# Altium PCB MasterBoardv2.PcbDoc (part 2 of 2)
Units mil, origin at the board's own origin, x right, y up, seen from the top; angles counter-clockwise.
Board outline 13400 x 7290 mil, 2 copper layers (Top Layer, Bottom Layer); 333 components, 276 nets, 860 pads, 107 vias.
Unrouted connection lines stored in the file: 191.
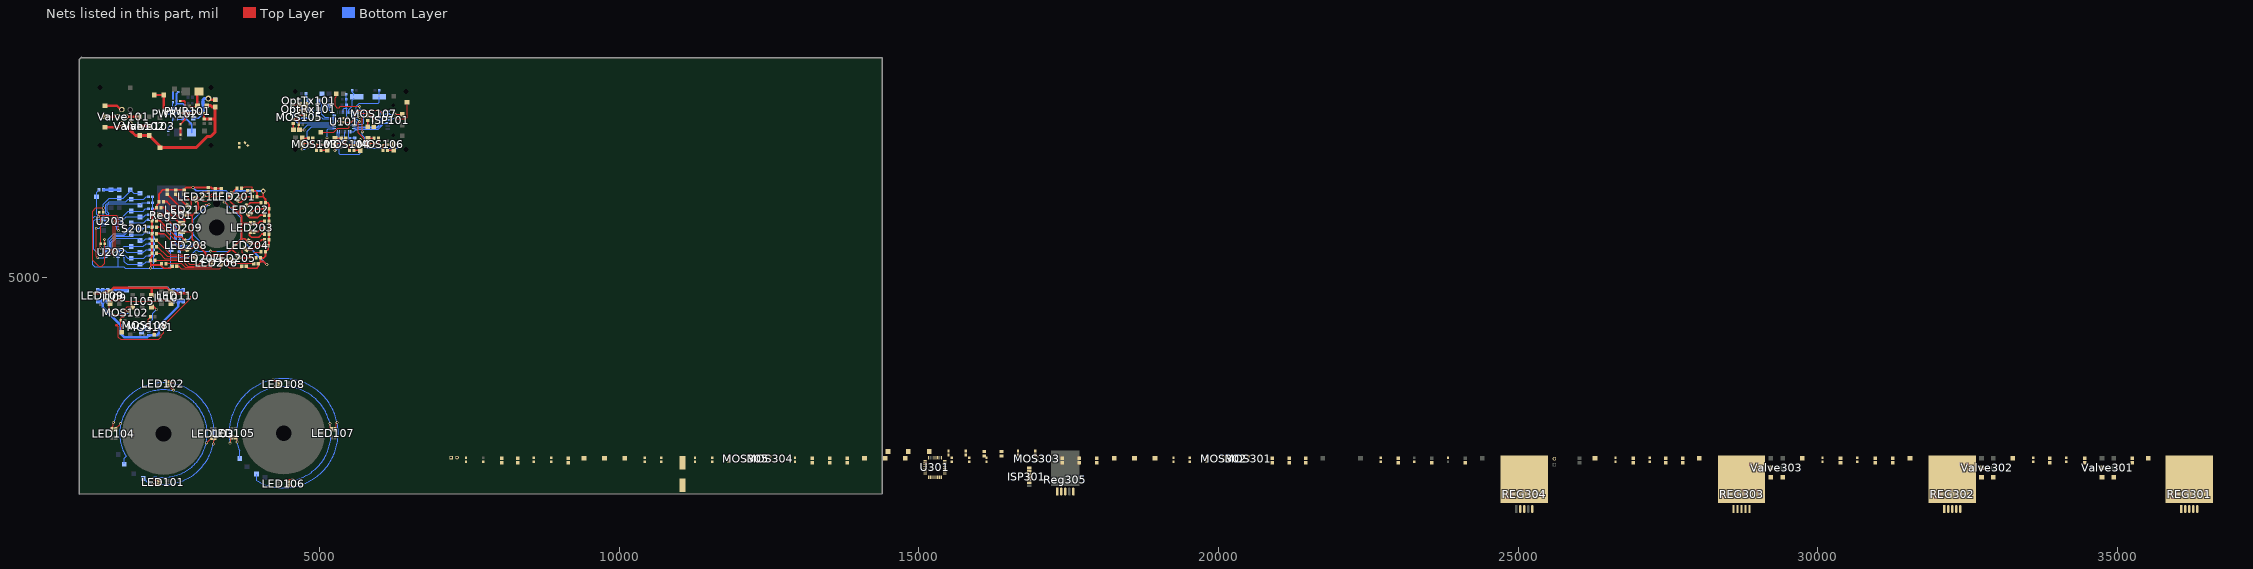
[diagram p2: the nets of this part, all layers, seen from the top]

## Via types
v1: diameter 50, hole 28, Top Layer to Bottom Layer, 95 vias
v2: diameter 40, hole 20, Top Layer to Bottom Layer, 8 vias
v3: diameter 80, hole 40, Top Layer to Bottom Layer, 2 vias
v4: diameter 100, hole 80, Top Layer to Bottom Layer, 1 vias
v5: diameter 100, hole 60, Top Layer to Bottom Layer, 1 vias

## Nets (pads, with @x,y where several pads share a name; then routed paths per layer and width w, separated by ;. In a path a pad name is that pad's centre, name@x,y a point inside that pad or via, vN(x,y) a via of type N, cw(c..) or ccw(c..) an arc to the next point about the centre after c; other vN are vias at no path point) (continued)
GND201A: C201.1 C202.1 C212.2 C215.1 C239.2 C240.1 C241.1 I210.1 I214.1 R201.2 R202.1 R203.2 R204.1 R205.2 R206.1 R207.2 R208.1 R209.2 R210.1 R211.1 R212.1 R213.1 R214.1 R215.1 R216.1 R217.1 R218.1 R219.1 R220.1 R221.1 R222.1 R223.1 R224.1 R225.1 R226.1 R227.1 R228.1 R229.1 R230.1 R231.1 R232.1 R233.1 R234.1 R235.1 R236.1 R237.1 R238.1 R239.1 R240.1 R241.1 R242.1 R243.1 R244.1 R245.2 R259.2 Reg201.3 U202.8 U202.15 U203.8 U203.15 | length 16687.6
  Top Layer w10: C212.2@1315,6068.46 v1(1315,6015) ; v1(1345,5490) C215.1@1345,5558.46 ; C215.1@1346.54,5560 1346.54,5983.46 v1(1315,6015) ; v1(1645,5775) 1645,5995 1605,6035 1335,6035 v1(1315,6015) ; R238.1@2740,6457.4 R238.1@2740,6465 ; C202.1@3088.98,6196.73 3107.25,6215 v1(3155,6215) ; v1(3183.46,5433.46) 3280,5433.46 ; v1(3410,6250) 3430,6250 3476.34,6203.66 ; R213.1@3697.4,6480 3720,6480 3745,6505 3870,6505 3877.4,6497.6 R212.1@3877.4,6440
  Top Layer w30: v1(2182.6,5152.6) 2182.6,5202.4 ; R228.1@2542.6,5180 2512.6,5150 2397.4,5150 2345,5202.4 2182.6,5202.4 ; R238.1@2740,6457.4 R239.1@2600,6457.4 R240.1@2460,6457.4 2387.4,6457.4 2322.6,6392.6 R235.1@2322.6,6260 2322.6,6242.6 2282.6,6202.6 R236.1@2282.6,6160 2280,6160 2242.6,6122.6 R237.1@2242.6,6060 2242.6,6032.6 2202.6,5992.6 R232.1@2202.6,5943.75 R233.1@2202.6,5835 R234.1@2202.6,5726.25 R229.1@2202.6,5617.5 R230.1@2202.6,5508.75 R231.1@2202.6,5400 2202.6,5342.6 2182.6,5322.6 R226.1@2182.6,5280 2182.6,5202.4 ; R238.1@2740,6465 2772.4,6497.4 v1@2890,6497.4 ; v1(2890,6495) v1@2890,6497.4 ; R243.1@3360,6477.4 R241.1@3260,6477.4 3212.6,6477.4 3192.6,6497.4 R242.1@3140,6497.4 v1@2890,6497.4 ; R223.1@3777.4,5180 3807.4,5150 3950,5150 3977.4,5177.4 R224.1@3977.4,5220 4017.4,5260 ; R212.1@3877.4,6440 3930,6440 3957.4,6412.6 R211.1@3957.4,6340 4060,6340 ; v3(4060,6435) 4060,6340 ; v1(4120,5210) 4070,5260 4017.4,5260 ; 4017.4,5260 R225.1@4017.4,5320 4070,5320 4097.4,5347.4 R220.1@4097.4,5420 4145,5467.6 4145,5520 4145,5527.6 4157.4,5540 R222.1@4157.4,5625 R217.1@4157.4,5720 R218.1@4157.4,5820 R219.1@4157.4,5932.5 R214.1@4157.4,6035 R215.1@4157.4,6137.5 4157.4,6217.6 4135,6240 R216.1@4097.4,6240 4097.4,6302.6 4060,6340
  Bottom Layer w10: R259.2@1322.6,6460 1280,6417.4 I210.1@1280,6340 1280,6050 v1(1315,6015) ; v1(1345,5490) 1360,5475 U202.15@1427.4,5475 ; U203.15@1407.4,5995 1335,5995 v1(1315,6015) ; U203.8@1620,5845 1620,5800 v1(1645,5775) ; U202.8@1640,5325 1640,5175 ; v1@2180,5145 1760,5145 1730,5175 1640,5175 ; v1@2182.6,5145 2220,5145 ; R201.2@2233.46,5260 2233.46,5158.46 2220,5145 ; Reg201.3@2526.14,5840 2520,5833.86 I214.1@2520,5460 2520,5340 ; v1(3155,6215) 2895,5955 2895,5705 2995,5605 2995,5510 2945,5460 ; v1(3410,6250) 3420,6250 3690,5980 3690,5645 3475,5430 3183.46,5430 2975,5430 2945,5460 ; v1(1315,6015) 1250,6015 1215,5980 1215,5210 1250,5175 1640,5175 ; 2220,5145 2480,5145 2520,5185 2520,5340 ; 2520,5340 2660,5340 2825,5340 2945,5460
  Bottom Layer w20: R245.2@2213.46,6340 R244.1@2213.46,6240 R210.1@2213.46,6140 R208.1@2213.46,6040 R206.1@2213.46,5960 R204.1@2213.46,5840 R202.1@2213.46,5740 2213.46,5696.54 2233.46,5676.54 R209.2@2233.46,5640 R207.2@2233.46,5560 R205.2@2233.46,5460 R203.2@2233.46,5360 R201.2@2233.46,5260
  Bottom Layer w30: v1@2180,5150 v1(2182.6,5152.6) ; C239.2@2733.46,5620 2810,5620 2895,5705 ; v1(2890,6495) 2945,6440 3440,6440 3520,6360 ; v1(3410,6250) 3520,6360 ; 3690,5640 v1(4120,5210) ; v3(4060,6435) 3595,6435 3520,6360
GND301: Batt301.2 C301.1 C302.1 C303.1 C304.1 C305.1 C306.1 C307.1 C308.1 C309.1 C310.1 C311.1 C312.1 C313.1 C314.1 C315.1 C316.1 C317.1 C318.1 C319.1 C320.1 C321.1 C322.1 C323.1 C324.1 C325.1 C326.1 C327.1 C328.1 C329.1 ISP301.6 MOS301.3 MOS301.6 MOS302.3 MOS302.6 MOS303.3 MOS303.6 MOS304.3 MOS304.6 MOS305.3 P301.2 R313.1 R319.1 R320.1 R321.1 R325.1 R326.1 R327.1 R331.1 R332.1 R333.1 REG301.3 REG301.6 REG302.3 REG302.6 REG303.3 REG303.6 REG304.3 REG304.6 Reg305.3 S301.2 TP319.1 TP320.1 TP321.1 U301.3 U301.5 U301.21 Valve301.2 Valve302.2 Valve303.2
HEADLIGHT_201: 
HEADLIGHT_201A: I213.1 R259.1 S203.2 | length 261.5
  Bottom Layer w40: R259.1@1397.4,6460 I213.1@1520,6460 S203.2@1658.9,6460
HEADLIGHTENABLE_101: I130.1 U101.12 | length 1167.4
  Top Layer w10: I130.1@5280,8060 5280,8010 5260,7990 5260,7860 5290,7830 5330,7830 5350,7850 v1(5670,7850)
  Bottom Layer w10: U101.12@5573.39,7605.75 5599.25,7605.75 5617.91,7587.09 5617.91,7561.63 5628.28,7551.26 5716.26,7551.26 5735,7570 5735,7770 5700,7805 5680,7805 5675,7810 5670,7810 v1(5670,7850)
HEADLIGHTENABLE_101A: I105.6 MOS108.2 R111.2 TP104.1 | length 783.7
  Top Layer w30: I105.6@2197.48,4500 2240,4500 v1(2280,4460)
  Bottom Layer w10: R111.2@1910,4158.46 2011.54,4158.46 2030,4140 TP104.1@2030,4085 2055,4085 2090,4120 MOS108.2@2090,4165 2090,4184.99 2098.79,4193.78 2113.78,4193.78 2215,4295 2215,4395 v1(2280,4460)
HVDC_201: 
ISENSE_201: 
KEY_201: 
MISO101: ISP101.3 U101.16 | length 698
  Bottom Layer w10: U101.16@5573.39,7479.76 5628.5,7479.76 5640,7491.26 5974.54,7491.26 6035,7551.72 6035,7650 6055,7670 ISP101.3@6135,7670
MISO201: 
MISO301: ISP301.3 U301.16
MOSI101: ISP101.1 U101.15 | length 781.3
  Bottom Layer w10: U101.15@5573.39,7511.26 5966.26,7511.26 6015,7560 6015,7735 6050,7770 ISP101.1@6140,7770 ISP101.1@6145,7770
MOSI201: 
MOSI301: ISP301.1 U301.15
NetBTValve401_1: 
NetBTValve401_2: 
NetC107_2: C107.2 U101.20 | length 152.1
  Bottom Layer w10: C107.2@5380,7286.54 5419.09,7325.63 5419.09,7414.09 U101.20@5425,7420
NetC108_2: C108.2 L101.1 U101.18 | length 190.3
  Bottom Layer w10: U101.18@5490,7425 5490,7333.46 C108.2@5505,7318.46 ; C108.2@5507.4,7322.4 L101.1@5585,7322.4
NetC118_2: C118.2 PWR101.8 | length 163.6
  Top Layer w10: PWR101.8@2760,7851.26 2760,7920
  Top Layer w30: C118.2@2673.46,7940 2740,7940 2760,7920
NetC119_2: C119.2 R131.1 | length 113.1
  Top Layer w30: C119.2@2680,7373.46 R131.1@2680,7486.54
NetC120_2: C120.2 PWR102.8 | length 228.4
  Bottom Layer w10: C120.2@2475,7443.46 2475,7495 2555,7575 PWR102.8@2555,7638.74
NetC121_2: C121.2 R133.1 | length 93.1
  Bottom Layer w40: R133.1@2555,7983.46 C121.2@2555,8076.54
NetC201_2: C201.2 C202.2 C240.2 C241.2 LED201.2 LED202.2 LED203.2 LED204.2 LED205.2 LED206.2 LED207.2 LED208.2 LED209.2 LED210.2 LED211.2 Reg201.2 | length 4335
  Top Layer w30: LED209.2@2745,5757.87 2872.13,5757.87 ; 2790,6035 2875,6035 ; 2871.59,5486.59 2925,5540 v3(2925,5580) ; LED211.2@2955,6265 2970,6250 2970,6130 ; C202.2@3031.02,6163.27 3003.27,6163.27 2970,6130 ; 3066.56,5336.56 3100,5370 3100,5360 3280,5360 3345,5360 3365,5380 ; 3095,5380 3095,5410 v3(2925,5580) ; LED206.2@3365,5274.45 3365,5380 ; LED201.2@3490,6333.31 3490,6285 3580,6195 3580,6135 ; 3523.66,6156.34 3558.66,6156.34 3580,6135 ; LED205.2@3616.28,5386.28 3537.56,5465 3525,5465 ; 3625,6090 3580,6135 ; 3701.95,6166.95 3701.95,6146.95 3635,6080 3700,6015 3700,5900 ; LED204.2@3789.07,5605.93 3755,5640 3700,5640 ; LED203.2@3825,5900 3700,5900 ; 2875,6035 2970,6130 ; 2875,6035 2875,5630 v3(2925,5580) ; 3365,5380 3440,5380 3525,5465 ; 3525,5465 3700,5640 ; 3700,5640 3700,5900
  Bottom Layer w30: C201.2@2660,5417.4 2660,5485
  Bottom Layer w50: Reg201.2@2593.07,5840 2593.07,5551.93 2635,5510 2855,5510 v3(2925,5580)
NetC208_2: 
NetC211_1: 
NetC211_2: 
NetC217_1: 
NetC217_2: 
NetC229_1: 
NetC230_2: 
NetC231_2: 
NetC232_2: 
NetC233_2: 
NetC322_2: C322.2 U301.20
NetD101_3: D101.3 L102.2 PWR101.5 | length 369.3
  Top Layer w10: PWR101.5@2836.77,7851.26 D101.3@2953.78,7851.26
  Top Layer w30: L102.2@2962.52,8070.31 L102.2@2992.2,8100
  Top Layer w40: D101.3@2962.52,7860 L102.2@2962.52,8070.31
NetD102_3: D102.3 L103.2 PWR102.5 | length 420.2
  Bottom Layer w10: PWR102.5@2631.77,7638.74 2726.26,7638.74 D102.3@2737.52,7650 D102.3@2765,7650
  Bottom Layer w30: D102.3@2765,7650 2867.2,7547.8 L103.2@2867.2,7410
NetEL201_1: 
NetL201_1: 
NetL202_1: 
NetL202_2: 
NetL204_1: 
NetL204_2: 
NetL301_1: L301.1 U301.18
NetLED109_2: LED109.2 LED110.2 R102.2 | length 2346.3
  Bottom Layer w40: LED109.2@1302.32,4597.48 LED109.2@1385,4597.48 ; LED109.2@1467.68,4597.48 LED109.2@1385,4597.48 ; LED110.2@2562.32,4597.48 LED110.2@2645,4597.48 ; LED110.2@2727.68,4597.48 LED110.2@2645,4597.48 ; LED109.2@1385,4597.48 1385,4495 1680,4200 1680,4060 1740,4000 2122.4,4000 R102.2@2150,4027.6 2277.6,4027.6 2320,4070 2320,4190 2645,4515 LED110.2@2645,4597.48
NetLED201_1: LED201.1 R213.2 | length 96
  Top Layer w30: LED201.1@3552.54,6417.46 3615.08,6480 R213.2@3622.6,6480
NetLED201_3: LED201.3 R211.2 | length 265
  Top Layer w30: 3654.88,6250 3685,6250 3775,6340 R211.2@3882.6,6340
NetLED201_4: LED201.4 R212.2 | length 176
  Top Layer w30: LED201.4@3666.65,6343.35 3713.31,6390 3752.6,6390 R212.2@3802.6,6440
NetLED202_1: LED202.1 R216.2 | length 220
  Top Layer w30: 3815,6210 3845,6240 R216.2@4022.6,6240
NetLED202_3: LED202.3 R214.2 | length 325.7
  Top Layer w30: LED202.3@3790,6035 3792.74,6032.26 3830,5995 3970,5995 4010,6035 R214.2@4082.6,6035
NetLED202_4: LED202.4 R215.2 | length 222.3
  Top Layer w30: LED202.4@3880,6090 3927.5,6137.5 R215.2@4082.6,6137.5
NetLED203_1: LED203.1 R219.2 | length 172.9
  Top Layer w30: LED203.1@3925,5895.67 3975.67,5895.67 4012.5,5932.5 R219.2@4082.6,5932.5
NetLED203_3: LED203.3 R217.2 | length 329.3
  Top Layer w30: LED203.3@3830,5739.45 3830,5700 3865,5665 3985,5665 4040,5720 R217.2@4082.6,5720
NetLED203_4: LED203.4 R218.2 | length 183.3
  Top Layer w30: LED203.4@3925,5757.87 3977.87,5757.87 4040,5820 R218.2@4082.6,5820
NetLED204_1: LED204.1 R222.2 | length 233.9
  Top Layer w30: LED204.1@3875.63,5560 3970,5560 4035,5625 R222.2@4082.6,5625
NetLED204_3: LED204.3 R220.2 | length 400.2
  Top Layer w10: 3710,5457.4 3710,5405 3745,5370 3870,5370 3917.07,5417.07 R220.2@4019.66,5417.07
  Top Layer w30: R220.2@4019.66,5417.07 R220.2@4022.6,5420
NetLED204_4: LED204.4 R221.2 | length 278.7
  Top Layer w30: LED204.4@3810,5457.07 3882.07,5457.07 3930,5505 3990,5505 4005,5520 R221.2@4062.6,5520
NetLED205_1: LED205.1 R225.2 | length 281.7
  Top Layer w30: LED205.1@3660.95,5320 R225.2@3942.6,5320
NetLED205_3: LED205.3 R223.2 | length 401.1
  Top Layer w10: LED205.3@3508.25,5306.08 3491.08,5306.08 3460,5275 3460,5190 3490,5160 R223.2@3702.6,5160
NetLED205_4: LED205.4 R224.2 | length 379.3
  Top Layer w10: LED205.4@3537.77,5254.94 3562.71,5230 3892.6,5230 R224.2@3902.6,5220
NetLED206_1: LED206.1 R228.2 | length 764.3
  Top Layer w10: 2695,5140 3335,5140
  Top Layer w20: 2655,5180 2695,5140 ; 3335,5140 3356.3,5161.3
  Top Layer w30: R228.2@2617.4,5180 2655,5180
NetLED206_3: LED206.3 R226.2 | length 1038.2
  Top Layer w10: R226.2@2257.4,5280 2710,5280 2804.85,5185.15 3115.15,5185.15 3207.13,5277.13 LED206.3@3215,5285
NetLED206_4: LED206.4 R227.2 | length 802.8
  Top Layer w10: 2760,5165 3205,5165
  Top Layer w20: R227.2@2437.4,5220 2450,5220 2465,5235 2690,5235 2760,5165
NetLED207_1: LED207.1 R231.2 | length 852.8
  Top Layer w10: R231.2@2277.4,5400 2330,5400 2420,5310 2740,5310 2835,5215 2997.09,5215 LED207.1@3037.03,5254.94
NetLED207_3: LED207.3 R229.2 | length 770.3
  Top Layer w10: R229.2@2277.4,5617.5 2519.92,5374.98 LED207.3@2947.22,5374.98
NetLED207_4: LED207.4 R230.2 | length 698
  Top Layer w10: R230.2@2296.25,5508.75 2460,5345 2770,5345 2791.16,5323.84 LED207.4@2917.7,5323.84
NetLED208_1: LED208.1 R234.2 | length 594.1
  Top Layer w20: 2410,5725 2677.93,5457.07
  Top Layer w30: R234.2@2277.4,5726.25 2328.75,5726.25 2330,5725 2410,5725 ; 2677.93,5457.07 LED208.1@2760,5457.07
NetLED208_3: LED208.3 R232.2 | length 629.2
  Top Layer w30: R232.2@2277.4,5943.75 2336.25,5943.75 2605,5675 2697.64,5675 LED208.3@2766.71,5605.93
NetLED208_4: LED208.4 R233.2 | length 524.7
  Top Layer w20: 2375,5835 2633.6,5576.4
  Top Layer w30: R233.2@2277.4,5835 2375,5835 ; 2633.6,5576.4 LED208.4@2695,5576.4
NetLED209_1: LED209.1 R237.2 | length 447.2
  Top Layer w30: R237.2@2317.4,6060 2365.2,6060 LED209.1@2647.6,5777.6
NetLED209_3: LED209.3 R235.2 | length 555.6
  Top Layer w30: R235.2@2397.4,6260 2455,6260 2585,6130 2585,6065 2665,5985 2720,5985 2745,5960 LED209.3@2745,5914.29
NetLED209_4: LED209.4 R236.2 | length 393.5
  Top Layer w30: R236.2@2357.4,6160 2402.99,6160 LED209.4@2649,5914
NetLED210_1: LED210.1 R240.2 | length 387.7
  Top Layer w30: R240.2@2460,6382.6 2645,6197.6 2645,6147.71 LED210.1@2698.86,6093.86
NetLED210_3: LED210.3 R238.2 | length 241
  Top Layer w30: R238.2@2740,6382.6 2860,6262.6 LED210.3@2860,6191.34
NetLED210_4: LED210.4 R239.2 | length 240.9
  Top Layer w30: R239.2@2600,6382.6 2600,6375 LED210.4@2765,6210
NetLED211_1: LED211.1 R243.2 | length 545.1
  Top Layer w10: LED211.1@2905,6345 2917.7,6345 2970,6345 3050,6265 3120,6265 3205,6350 3307.4,6350 R243.2@3360,6402.6
NetLED211_3: LED211.3 R241.2 | length 216.3
  Top Layer w10: LED211.3@3066.56,6347.46 3162.46,6347.46 3217.6,6402.6 R241.2@3260,6402.6
NetLED211_4: LED211.4 R242.2 | length 79
  Top Layer w10: LED211.4@3061.02,6422.6 R242.2@3140,6422.6
NetLED401_1: 
NetLED401_2: 
NetLED401_3: 
NetLED401_4: 
NetLED402_1: 
NetLED402_2: 
NetLED402_3: 
NetLED402_4: 
NetMOS101_1: MOS101.1 R103.2 | length 177.6
  Top Layer w10: MOS101.1@2140,4180 2140,4297.4 R103.2@2182.6,4340
NetMOS101_4: MOS101.4 R104.2 | length 114.8
  Top Layer w10: 2206.93,4128.07 MOS101.4@2206.93,4140
  Top Layer w15: 2206.93,4128.07 2242.6,4092.4 R104.2@2242.6,4040
NetMOS102_1: MOS102.1 MOS102.4 R101.2 | length 445.7
  Top Layer w10: R101.2@1546.45,4373.55 R101.2@1546.93,4373.07 ; 1720,4373.07 MOS102.4@1740,4373.07 ; MOS102.1@1780,4440 1800,4440 v2(1820,4420)
  Top Layer w20: R101.2@1546.93,4373.07 1645,4373.07 1720,4373.07
  Bottom Layer w10: v2@1640,4370 v2(1645,4375) 1670,4400 1805,4400 1820,4415 v2(1820,4420)
NetMOS103_1: MOS103.1 R106.2 | length 60
  Top Layer w25: 4890,7250 R106.2@4890,7310
NetMOS103_4: MOS103.4 R118.2 | length 65
  Top Layer w25: R118.2@4955,7125 4955,7190
NetMOS104_1: MOS104.1 R107.2 | length 70
  Top Layer w25: R107.2@5500,7115 5500,7185
NetMOS104_4: MOS104.4 R105.2 | length 78.1
  Top Layer w25: 5433.07,7245 R105.2@5433.07,7323.07
NetMOS105_1: MOS105.1 R116.2 | length 75
  Top Layer w25: 4695,7700 R116.2@4770,7700
NetMOS105_4: MOS105.4 R115.2 | length 61.9
  Top Layer w25: R115.2@4573.07,7633.07 4635,7633.07
NetMOS106_1: MOS106.1 R124.2 | length 55
  Top Layer w25: 5990,7245 R124.2@5990,7300
NetMOS106_4: MOS106.4 R122.2 | length 55
  Top Layer w25: R122.2@6055,7130 6055,7185
NetMOS107_1: MOS107.1 R123.2 | length 70
  Top Layer w25: R123.2@5805,7690 5875,7690
NetMOS108_1: MOS108.1 R102.1 | length 65.7
  Bottom Layer w10: MOS108.1@2110,4165 2110,4110 2117.6,4102.4
NetMOS201_1: 
NetMOS201_4: 
NetMOS202_1: 
NetMOS202_4: 
NetMOS203_1: 
NetMOS203_4: 
NetMOS206_1: 
NetMOS301_1: MOS301.1 R316.2
NetMOS301_4: MOS301.4 R317.2
NetMOS302_1: MOS302.1 R318.2
NetMOS302_4: MOS302.4 R322.2
NetMOS303_1: MOS303.1 R323.2
NetMOS303_4: MOS303.4 R324.2
NetMOS304_1: MOS304.1 R328.2
NetMOS304_4: MOS304.4 R329.2
NetMOS305_1: MOS305.1 R330.2
NetPWR101_1: PWR101.1 R131.2 | length 159.7
  Top Layer w10: 2760,7633.46 PWR101.1@2760,7680
  Top Layer w30: R131.2@2680,7553.46 2760,7633.46
NetPWR101_2: PWR101.2 R129.1 R132.2 | length 393.1
  Top Layer w10: R132.2@2673.46,7740 R129.1@3006.54,7740 ; PWR101.2@2785.59,7680 2785.59,7740
NetPWR102_1: PWR102.1 R133.2 | length 106.5
  Bottom Layer w10: PWR102.1@2555,7810 R133.2@2555,7916.54
NetPWR102_2: PWR102.2 R130.1 R134.2 | length 544.8
  Bottom Layer w10: PWR102.2@2580.59,7810 2580.59,7854.41
  Bottom Layer w20: 2580.59,7854.41 2615,7888.82 2618.86,7892.68
  Bottom Layer w30: 2615,7888.82 2615,8063.46 R134.2@2641.54,8090 ; 2618.86,7892.68 2722.32,7892.68 2741.54,7873.46 R130.1@2741.54,7770
NetR263a_1: 
NetR265_1: 
NetR267_2: 
NetR268_2: 
NetR301_2: R301.2 REG301.4
NetR306_2: R306.2 REG302.4
NetR312_2: R312.2 REG303.4
NetR314_2: R314.2 REG304.5
NetU202_4: U202.4 U203.2 | length 767.3
  Top Layer w10: v2(1550,5995) 1535,5995 1542.5,5987.5 1595,5935 1595,5455 1570,5430 1565,5425 v2(1575,5425)
  Bottom Layer w10: v2(1550,5995) U203.2@1620,5995 ; v2(1575,5425) U202.4@1640,5425
NetU202_7: U202.7 U203.5 | length 736.1
  Top Layer w10: v2(1555,5920) 1555,5475 1525,5445 1525,5395 v2(1570,5350)
  Bottom Layer w10: v2(1555,5920) U203.5@1620,5920 ; v2(1570,5350) U202.7@1640,5350
NetU202_9: U202.9 U203.11 | length 813.1
  Top Layer w10: v2(1275,5815) 1275,5350 v2(1300,5325)
  Bottom Layer w10: v2(1275,5815) 1276.26,5816.26 1325,5816.26 1354.37,5845.63 1354.37,5879.37 1370,5895 U203.11@1407.4,5895 ; v2(1300,5325) U202.9@1427.4,5325
NetU202_12: U202.12 U203.14 | length 879.2
  Bottom Layer w10: U203.14@1407.4,5970 1265,5970 1235,5940 1235,5465 1300,5400 U202.12@1427.4,5400
NetValve101_4: Valve101.4 Valve102.1 | length 228
  Top Layer w40: Valve101.4@1771.65,7677.17 Valve102.1@1999.69,7677.17
NetValve102_2: Valve102.2 Valve103.2 | length 160
  Top Layer w50: Valve102.2@2000,7520 Valve103.2@2160,7520
OPT_RX_101: OptRx101.1 U101.30 | length 391.1
  Bottom Layer w10: OptRx101.1@4980,7800 4980,7710 5050,7640 5245,7640 U101.30@5250,7635
OPT_RX_201: 
OPT_TX_101: OptTx101.1 U101.31 | length 458.6
  Bottom Layer w10: OptTx101.1@4990,7930 5040,7880 5040,7720 5091.26,7668.74 U101.31@5246.61,7668.74
OPT_TX_201: 
PGATE_201: 
R_CONTROL_101: I109.3 I110.4 R101.1 | length 1268.9
  Top Layer w10: I109.3@1493.55,4551.03 I109.3@1502.52,4560
  Top Layer w15: I109.3@1502.52,4560 1502.52,4587.52 1540,4625 1730,4625 1755,4600 2290,4600 2315,4625 2495,4625 2520,4600 I110.4@2520,4560
  Top Layer w20: R101.1@1493.55,4426.45 I109.3@1493.55,4551.03
R_CONTROL_101L: I115.1 LED101.1 LED102.1 LED103.1 LED104.1 | length 4675.4
  Top Layer w20: LED104.1@1594.53,2469.53 v1(1680,2555) ; v1(2210,1640) 2240.47,1609.53 LED101.1@2327.44,1609.53 LED101.1@2320.47,1609.53 ; LED102.1@2474.53,3200.47 2474.88,3200.12 v1(2560,3115) ; v1(3115,2235) 3200.47,2320.47 LED103.1@3200.47,2321.1
  Bottom Layer w20: I115.1@1740,1890 1740,1974.08 1774.13,2008.22 cw(c2396.34,2390) 2257.58,1673.31 2243.31,1673.31 v1(2210,1640)
R_CONTROL_101R: I117.1 LED105.1 LED106.1 LED107.1 LED108.1 | length 5456.7
  Top Layer w10: v1(4225,3285) v1@4240,3270 ; v1@4555,1520 v1(4570,1505) ; LED107.1@5259.53,2463.9 LED107.1@5280,2484.37 ; v1@5280,2560 v1(5295,2575)
  Top Layer w20: v1(3505,2230) 3520,2245 LED105.1@3520,2320.63 ; v1@4240,3270 LED108.1@4315.63,3270 ; LED106.1@4479.37,1520 v1@4555,1520 ; LED107.1@5280,2484.37 v1@5280,2560
  Bottom Layer w10: 3945.99,1607.12 3950,1611.12
  Bottom Layer w20: v1@3506.37,2230.26 cw(c4401.34,2395) 3945.99,1607.12 ; 3950,1611.12 I117.1@3950,1715
R_PWM_101: I129.1 U101.32 | length 188.6
  Bottom Layer w10: I129.1@5165,7855 5165,7781.85 U101.32@5246.61,7700.24
R_PWM_101A: I105.2 MOS102.2 MOS102.5 R110.2 TP103.1 | length 592.2
  Top Layer w10: 1735,4330 1760,4355 MOS102.5@1760,4373.07 MOS102.2@1760,4440 ; MOS102.2@1760,4450 1760,4475 1790,4505 1870,4505 1873.76,4508.76 I105.2@1890,4525
  Top Layer w20: TP103.1@1700,4080 1700,4155 1686.54,4168.46 R110.2@1686.54,4280 1686.54,4316.54 1700,4330 1735,4330
RESET101: ISP101.2 R128.1 S101.1 U101.29 | length 1305.9
  Top Layer w10: v1(5320,7605) 5381.54,7605 R128.1@5400,7586.54 5526.54,7586.54 5595,7655 5595,7740 5640.71,7785.71 5994.29,7785.71 v1(6060,7720) ; v1@6265,7720 S101.1@6380,7720
  Bottom Layer w10: U101.29@5246.61,7605.75 5319.25,7605.75 v1(5320,7605) ; v1(6060,7720) ISP101.2@6140,7720 v1(6260,7720) v1@6270,7720
RESET201: 
RESET301: ISP301.2 R334.1 S301.1 U301.29
SCK101: ISP101.5 U101.17 | length 685.9
  Bottom Layer w10: U101.17@5520.24,7426.61 5575.05,7426.61 5608.2,7459.76 5638.5,7459.76 5650,7471.26 5982.83,7471.26 6055,7543.43 6055,7555 6070,7570 ISP101.5@6140,7570
SCK201: 
SCK301: ISP301.5 U301.17
SMPSBENABLE_101: I124.1 U101.14 | length 626.3
  Top Layer w10: I124.1@5020,7420 5240,7420 5305,7485 5480,7485 5500,7505 v1(5500,7545)
  Bottom Layer w10: v1@5502.24,7542.76 U101.14@5573.39,7542.76
SMPSBENABLE_101B: I120.1 PWR102.3 TP119.1 | length 722.2
  Top Layer w40: TP119.1@2240,8040 I120.1@2400,8040 v1(2400,7785)
  Bottom Layer w10: 2606.18,7740 PWR102.3@2606.18,7810
  Bottom Layer w40: v1(2400,7785) 2460,7725 2591.18,7725 2606.18,7740
SW_201: R207.1 S201.5 U202.2 | length 561.7
  Bottom Layer w10: U202.2@1640,5475 1705,5475 1742.6,5512.6 S201.5@1860,5512.6 2057.6,5512.6 2105,5560 R207.1@2166.54,5560
SW_202: R203.1 S201.2 U202.5 | length 579.8
  Bottom Layer w10: U202.5@1640,5400 1720,5400 1804.25,5315.75 S201.2@1860,5315.75 2065.75,5315.75 2110,5360 R203.1@2166.54,5360
SW_203: R202.2 S201.7 U202.11 | length 960.9
  Bottom Layer w10: U202.11@1427.4,5375 1459.66,5375 1487.5,5402.84 1487.5,5417.5 1515.87,5445.87 1515.87,5585.87 1610,5680 1830.55,5680 S201.7@1860,5709.45 2054.45,5709.45 2085,5740 R202.2@2146.54,5740
SW_204: R206.2 S201.9 U202.14 | length 1060
  Bottom Layer w10: U202.14@1427.4,5450 1460,5450 1475.87,5465.87 1475.87,5630.87 1570,5725 1735,5725 1860,5850 S201.9@1860,5906.3 2066.3,5906.3 2120,5960 R206.2@2146.54,5960
SW_205: R205.1 S201.3 U202.3 | length 560.4
  Bottom Layer w10: U202.3@1640,5450 1750,5450 1785.83,5414.17 S201.3@2005.67,5414.17 2059.17,5414.17 2105,5460 R205.1@2166.54,5460
SW_206: R201.1 S201.1 U202.6 | length 644.7
  Bottom Layer w10: U202.6@1640,5375 1690,5375 1745,5320 1745,5260 1787.68,5217.32 S201.1@2005.67,5217.32 2062.32,5217.32 2105,5260 R201.1@2166.54,5260
SW_207: R209.1 S201.6 U202.10 | length 981.1
  Bottom Layer w10: U202.10@1427.4,5350 1470,5350 1540,5420 1540,5579.95 1605.05,5645 1971.69,5645 S201.6@2005.67,5611.02 2071.02,5611.02 2100,5640 R209.1@2166.54,5640
SW_208: R204.2 S201.8 U202.13 | length 978.9
  Bottom Layer w10: U202.13@1427.4,5425 1465,5425 1495.87,5455.87 1495.87,5605.87 1590,5700 1745,5700 1852.87,5807.87 S201.8@2005.67,5807.87 2057.87,5807.87 2090,5840 R204.2@2146.54,5840
SW_209: R210.2 S201.11 U203.3 | length 597
  Bottom Layer w10: U203.3@1620,5970 1675,5970 1808.15,6103.15 S201.11@1860,6103.15 2058.15,6103.15 2095,6140 R210.2@2146.54,6140
SW_210: R208.2 S201.10 U203.6 | length 586.6
  Bottom Layer w10: U203.6@1620,5895 1665,5895 1774.72,6004.72 S201.10@2005.67,6004.72 2064.72,6004.72 2100,6040 R208.2@2146.54,6040
SW_211: R244.2 S201.12 U203.10 | length 1113.9
  Bottom Layer w10: U203.10@1407.4,5870 1411.16,5873.76 1443.42,5873.76 1485,5915.34 1485,6065 1460,6090 1460,6200 1485,6225 1982.24,6225 S201.12@2005.67,6201.57 2044.09,6240 R244.2@2146.54,6240
SW_212: R245.1 S201.13 U203.13 | length 1081.6
  Bottom Layer w10: U203.13@1407.4,5945 1445,5945 1460,5960 1460,6040 1435,6065 1435,6205 1490,6260 1765,6260 1805,6300 S201.13@1860,6300 2065,6300 2105,6340 R245.1@2146.54,6340
VALVE+301: C303.2 C304.2 R301.1 REG301.5 TP301.1 U301.27 Valve301.1
VALVE+302: C307.2 C308.2 R306.1 REG302.5 TP303.1 U301.28 Valve302.1
VALVE+303: C311.2 C312.2 R312.1 REG303.5 TP305.1 U301.19 Valve303.1
VALVE_B_101: I125.1 R106.1 | length 92.6
  Top Layer w25: I125.1@4720,7320 R106.1@4812.6,7320
VALVE_B_101B: I107.1 Valve101.1 | length 306.7
  Top Layer w40: I107.1@1420,7500 1644.88,7500 Valve101.1@1702.76,7557.87
VALVE_B_102: I126.1 R116.1 | length 82.6
  Top Layer w25: R116.1@4765,7777.4 I126.1@4765,7860
VALVE_B_103: I128.1 R123.1 | length 92.6
  Top Layer w25: I128.1@5805,7520 R123.1@5805,7612.6
VALVE_B_201: 
VALVE_B_202: 
VALVE_B_301: R317.1
VALVE_B_302: R323.1
VALVE_B_303: R329.1
VALVE_B_PWM_101: MOS103.2 R113.2 TP106.1 U101.26 | length 1093.1
  Top Layer w10: v1(4710,7135) TP106.1@4710,7220 ; TP106.1@4735,7235 4815,7235 4830,7220 MOS103.2@4890,7220
  Bottom Layer w10: v1@4705,7135 v1(4710,7135) 4750,7135 4795,7180 4795,7435 4871.26,7511.26 U101.26@5246.61,7511.26
VALVE_B_PWM_102: MOS105.2 R120.2 TP109.1 U101.28 | length 1205.4
  Top Layer w10: v1@4570,7880 TP109.1@4665,7880 ; MOS105.2@4665,7700 4665,7775 R120.2@4670,7780 ; R120.2@4678.46,7780 TP109.1@4678.46,7866.54
  Bottom Layer w10: v1(4570,7875) 4570,7635 4630.75,7574.25 U101.28@5246.61,7574.25
VALVE_B_PWM_103: MOS107.2 R126.2 TP113.1 U101.9 | length 526.8
  Top Layer w10: v1(5670,7735) 5860,7735 5876.22,7718.78 5896.21,7718.78 5905,7709.99 MOS107.2@5905,7690 R126.2@5905,7620 ; TP113.1@5891.54,7523.46 R126.2@5891.54,7610
  Bottom Layer w10: U101.9@5573.39,7700.24 5610,7736.85 v1@5663.15,7736.85
VALVE_B_PWM_201: 
VALVE_B_PWM_202: 
VALVE_B_PWM_301: MOS301.5 R320.2 TP311.1 U301.2
VALVE_B_PWM_302: MOS303.2 R326.2 TP314.1 U301.11
VALVE_B_PWM_303: MOS304.5 R332.2 TP317.1 U301.14
VALVE_G_101: I136.1 R105.1 | length 90
  Top Layer w25: I136.1@5260,7315 R105.1@5350,7315
VALVE_G_101B: I119.1 Valve101.3 | length 211
  Top Layer w40: I119.1@1422.83,7677.17 Valve101.3@1633.86,7677.17
VALVE_G_102: I137.1 R115.1 | length 100
  Top Layer w25: I137.1@4565,7440 R115.1@4565,7540
VALVE_G_103: I127.1 R122.1 | length 92.6
  Top Layer w25: R122.1@6137.4,7120 I127.1@6230,7120
VALVE_G_201: 
VALVE_G_202: 
VALVE_G_301: R316.1
VALVE_G_302: R322.1
VALVE_G_303: R328.1
VALVE_G_PWM_101: MOS104.5 R112.2 TP105.1 U101.24 | length 621.2
  Top Layer w10: TP105.1@5250,7235 5345,7235 5365,7215 MOS104.5@5433.07,7215 ; v1@5260,7130 TP105.1@5260,7215
  Bottom Layer w10: v1(5255,7115) 5280,7115 5299.76,7134.76 U101.24@5299.76,7426.61
VALVE_G_PWM_102: MOS105.5 R119.2 TP108.1 U101.27 | length 817.2
  Top Layer w10: TP108.1@4651.54,7448.46 R119.2@4651.54,7540 ; R119.2@4660,7545 4665,7550 MOS105.5@4665,7633.07 ; TP108.1@4665,7460 v1@4740,7460
  Bottom Layer w10: v1@4745,7450 v1(4745,7455) 4745,7485 4802.76,7542.76 U101.27@5246.61,7542.76
VALVE_G_PWM_103: MOS106.5 R125.2 TP112.1 U101.10 | length 1525.3
  Top Layer w10: v1(5670,7665) 5685,7665 5715,7635 v1(5715,7425) v1@5715,7415 ; MOS106.5@6056.93,7215 R125.2@6130,7215 ; R125.2@6140,7206.54 TP112.1@6238.46,7206.54 ; TP112.1@6240,7220 v1(6320,7220) v1@6330,7220
  Bottom Layer w10: U101.10@5573.39,7668.74 v1@5666.26,7668.74 ; v1@5715,7430 v1(5715,7425) 5715,7365 5755,7325 5755,7190 5795,7150 6295,7150 6320,7175 v1(6320,7220)
VALVE_G_PWM_201: 
VALVE_G_PWM_202: 
VALVE_G_PWM_301: MOS301.2 R319.2 TP310.1 U301.1
VALVE_G_PWM_302: MOS302.5 R325.2 TP313.1 U301.10
VALVE_G_PWM_303: MOS304.2 R331.2 TP316.1 U301.13
VALVE_R_101: I134.1 R107.1 | length 92.6
  Top Layer w25: R107.1@5577.4,7115 I134.1@5670,7115
VALVE_R_101B: I108.1 Valve101.5 | length 309.1
  Top Layer w10: Valve101.5@1683.54,7796.46 Valve101.5@1702.76,7796.46
  Top Layer w40: I108.1@1420,7860 1620,7860 Valve101.5@1683.54,7796.46
VALVE_R_102: I135.1 R118.1 | length 107.6
  Top Layer w10: I135.1@5130,7120 I135.1@5135,7120
  Top Layer w25: R118.1@5027.4,7120 I135.1@5130,7120
VALVE_R_103: I102.1 R124.1 | length 102.6
  Top Layer w25: I102.1@5810,7315 R124.1@5912.6,7315
VALVE_R_201: 
VALVE_R_202: 
VALVE_R_301: R318.1
VALVE_R_302: R324.1
VALVE_R_303: R330.1
VALVE_R_PWM_101: MOS104.2 R114.2 TP107.1 U101.23 | length 1231.7
  Top Layer w10: MOS104.2@5500,7215 5575,7215 5585,7205 TP107.1@5690,7205 ; TP107.1@5680,7215 v1(5680,7295)
  Bottom Layer w10: U101.23@5331.26,7426.61 5329.88,7425.24 5329.88,7060.12 5340,7050 5665,7050 5680,7065 v1(5680,7295)
VALVE_R_PWM_102: MOS103.5 R121.2 TP110.1 U101.25 | length 521.4
  Top Layer w10: MOS103.5@4956.93,7220 R121.2@5020,7220 ; R121.2@5030,7206.54 5111.54,7206.54 TP110.1@5120,7215 ; TP110.1@5125,7235 v1@5125,7320
  Bottom Layer w10: v1@5125,7310 v1(5125,7325) 5125,7460 5144.76,7479.76 U101.25@5246.61,7479.76
VALVE_R_PWM_103: MOS106.2 R127.2 TP114.1 U101.11 | length 757.6
  Top Layer w10: v1@5660,7590 5645,7575 5645,7410 5740,7315 5740,7235 5760,7215 TP114.1@5810,7215 ; TP114.1@5821.54,7233.46 R127.2@5920,7233.46 ; R127.2@5925,7230 5940,7215 MOS106.2@5990,7215
  Bottom Layer w10: U101.11@5573.39,7637.24 5622.76,7637.24 v1@5665,7595
  other v1: 5670,7595
VALVE_R_PWM_201: 
VALVE_R_PWM_202: 
VALVE_R_PWM_301: MOS302.2 R321.2 TP312.1 U301.32
VALVE_R_PWM_302: MOS303.5 R327.2 TP315.1 U301.9
VALVE_R_PWM_303: MOS305.2 R333.2 TP318.1 U301.12
VALVEEN301: REG301.1 TP302.1 U301.23
VALVEEN302: REG302.1 TP304.1 U301.24
VALVEEN303: REG303.1 TP306.1 U301.25
VBATT201A: C239.1 I211.1 Reg201.1 | length 214.8
  Bottom Layer w10: I211.1@2660,5720 I211.1@2680,5700
  Bottom Layer w30: I211.1@2660,5720 Reg201.1@2660,5840 ; C239.1@2666.54,5620 I211.1@2666.54,5686.54
VCC101: C102.2 C104.2 C105.2 C106.2 C109.2 C126.2 C127.2 C128.2 I133.1 ISP101.4 L101.2 OptRx101.2 OptTx101.2 R128.2 TP125.1 U101.4 U101.6 | length 1954.9
  Top Layer w10: R128.2@5400,7653.46 v1@5463.46,7653.46 ; v1@6255,7655 v1(6265,7655) 6275,7655 6290,7640 6430,7640 6460,7670 TP125.1@6460,7920
  Bottom Layer w10: C127.2@4655,7651.54 4713.46,7651.54 4715,7650 4875,7650 4905,7680 4905,7785 4885,7805 OptRx101.2@4830,7805 ; C126.2@4777.4,8060 4777.4,8007.6 4825,7960 4825,7815 OptRx101.2@4830,7810 ; U101.4@5394.25,7753.39 5394.25,7799.25 5410,7815 5455,7815 ; C104.2@5445,7860 5445,7825 5455,7815 ; C105.2@5445,8045 5445,7965 5447.4,7962.6 C104.2@5447.4,7870 ; v1@5465,7660 5457.24,7667.76 U101.6@5457.24,7753.39 5457.24,7812.76 5455,7815 ; C128.2@5578.46,7185 5578.46,7233.46 L101.2@5585,7240 ; ISP101.4@6140,7620 6195,7620 6230,7655 v1(6265,7655)
  other v1: 5465,7655
VCC101A: LED109.1 LED110.1 TP126.1 | length 1456.4
  Bottom Layer w40: LED109.1@1302.32,4782.52 LED109.1@1385,4782.52 LED109.1@1467.68,4782.52 ; LED109.1@1472.68,4782.52 LED109.1@1467.68,4782.52 ; LED110.1@2562.32,4782.52 2502.48,4782.52 2465,4820 1817.48,4820 TP126.1@1780,4782.52 LED109.1@1467.68,4782.52 ; LED110.1@2567.32,4782.52 LED110.1@2645,4782.52 LED110.1@2727.68,4782.52
VCC101B: C112.2 C113.2 D101.1 I121.1 R129.2 TP118.1 Valve101.2 Valve102.3 Valve103.3 | length 2599.7
  Top Layer w10: I121.1@2340,7160 I121.1@2340,7182.52
  Top Layer w30: C112.2@3070,7647.4 3070,7723.46 R129.2@3080,7733.46
  Top Layer w50: Valve101.2@1840.55,7557.87 1840.55,7449.45 1927.48,7362.52 Valve102.3@2000,7362.52 Valve103.3@2160,7362.52 I121.1@2340,7182.52 ; I121.1@2340,7160 2940,7160 3125,7345 3185,7345 3260,7420 TP118.1@3260,7840 3205,7840 3185,7860 D101.1@3120,7860 ; C112.2@3080,7637.4 C113.2@3180,7637.4 3252.6,7637.4
VCC102A: C122.2 C123.2 C124.2 C125.2 I105.5 I109.1 I110.2 | length 3597.8
  Top Layer w10: C124.2@1360,4733.46 C124.2@1361.54,4735 ; 1615,4200 1645,4170 1645,4000 1680,3965 2318.73,3965 2357.99,4004.26 2357.99,4032.99 2397.52,4072.52 2397.52,4197.52 2850,4650 2850,4680
  Top Layer w40: C125.2@1240,4733.46 C124.2@1360,4733.46 ; C124.2@1361.54,4735 1410,4735 1431.85,4756.85 I109.1@1502.52,4756.85 1571.89,4826.22 1711.8,4826.22 1713.02,4825 2309.5,4825 2310.72,4826.22 2450.63,4826.22 I110.2@2520,4756.85 2593.15,4756.85 2621.54,4728.46 C122.2@2690,4728.46 C123.2@2790,4728.46 ; 1610,4200 1615,4200 1616.54,4200 ; I105.5@2197.48,4696.85 2197.48,4822.52
VCC102B: C116.2 C117.2 D102.1 I123.1 R130.2 TP116.1 | length 824.9
  Top Layer w50: v5(3145,7980) 3165,7960 I123.1@3260,7960
  Bottom Layer w30: R130.2@2808.46,7770 2845,7770 2895,7720 D102.1@2895,7650 2980,7650 3052.4,7722.4 C117.2@3052.4,7770
  Bottom Layer w50: C117.2@3052.4,7770 C116.2@3052.4,7910 3052.4,7957.4 3075,7980 v5(3145,7980)
VCC102L: I111.1 LED101.2 LED102.2 LED103.2 LED104.2 | length 4636.2
  Top Layer w20: LED104.2@1515,2475 1519.68,2479.68 1560.47,2520.47 v1(1560.47,2575.47) ; v1(2209.53,1550.47) LED101.2@2327.44,1550.47 ; 2480,3280 2487.85,3272.15 2525.47,3234.53 v1(2580.47,3234.53) ; v1(3234.53,2214.53) 3234.53,2269.53 3272.82,2307.82 LED103.2@3280,2315
  Bottom Layer w20: v1@1565.81,2570.91 cw(c2396.34,2390) 2196.07,1563.93 cw(c2396.34,2390) 2117.45,1587.05 I111.1@2080,1624.5
VCC102R: I113.1 LED105.2 LED106.2 LED107.2 LED108.2 | length 4291.4
  Top Layer w10: LED107.2@5175,2489.37 LED107.2@5200.47,2463.9
  Top Layer w20: v1(3625,2250) LED105.2@3625,2315.63 ; v1(4245,3165) LED108.2@4310.63,3165 ; 4484.37,1625 v1(4550,1625) ; LED107.2@5175,2489.37 v1(5175,2555)
  Bottom Layer w10: 3653.73,2126.27 3653.73,2128.34
  Bottom Layer w20: 3653.73,2126.27 3670,2110 I113.1@3670,1975 ; 3653.73,2128.34 cw(c4401.34,2383.65) v1@4550.41,1607.84
VCC201: 
VCC201A: C212.1 C215.2 I209.1 S201.14 S203.1 U202.16 U203.16 | length 2839.6
  Top Layer w10: C212.1@1395,6081.54 v1(1395,6155) 1270,6155 1215,6100 1215,5285 1315,5185 1370,5185 1413.46,5228.46 C215.2@1413.46,5560 ; C215.2@1415,5561.54 v1(1415,5630)
  Bottom Layer w10: U203.16@1407.4,6020 1395,6032.4 v1(1395,6155) 1395,6220 1495,6320 I209.1@1660,6320 1725,6320 1840,6435 S203.1@1840,6460 1901.57,6398.43 S201.14@2005.67,6398.43 ; v1(1415,5630) 1415,5512.4 U202.16@1427.4,5500
VCC301: C301.2 C302.2 C305.2 C306.2 C309.2 C310.2 C313.2 C314.2 C319.2 C320.2 C321.2 C327.2 C328.2 C329.2 ISP301.4 L301.2 R334.2 REG301.2 REG302.2 REG303.2 REG304.2 Reg305.2 U301.4 U301.6 Valve301.3 Valve302.3 Valve303.3
VFB_201: 
VIN301: C324.2 C325.2 C326.2 P301.1 Reg305.1 Reg305.5
XTAL101: C101.2 U101.7 Y101.1 | length 366.2
  Bottom Layer w10: U101.7@5488.74,7753.39 5488.74,7793.74 5550,7855 5550,7955 Y101.1@5580,7985 ; C101.2@5546.54,8120 5546.54,8088.46 5575,8060 Y101.1@5575,8035
XTAL102: C103.2 U101.8 Y101.2 | length 754.3
  Bottom Layer w10: U101.8@5520.24,7753.39 5573.39,7753.39 5610,7790 5610,7850 5660,7900 5980,7900 6000,7920 Y101.2@6000,8010 ; Y101.2@5991.54,8041.54 5993.46,8041.54 C103.2@5993.46,8120
XTAL201: 
XTAL202: 
XTAL301: C317.2 U301.7 Y301.1
XTAL302: C318.2 U301.8 Y301.2
pads on no net: C323.2 ISP101.0 ISP101.7 ISP301.0 ISP301.7 MOS107.4 MOS107.5 MOS107.6 MOS108.4 MOS108.5 MOS108.6 MOS305.4 MOS305.5 MOS305.6 Reg201.4 Reg201.6 Reg305.4 Reg305.6 S204.0 U101.13 U101.22 U301.30 U301.31 Valve301.4 Valve301.5 Valve301.6 Valve302.4 Valve302.5 Valve302.6 Valve303.4 Valve303.5 Valve303.6

## Polygon pours and split planes (outlines as drawn)
GND101 on Top Layer "PSU board gnd" (solid, remove dead copper, pour order 1000): 4435,8200 6610,8200 6610,7005 4435,7005
BATTERYSENSE_101B on Top Layer "PSU board vcc" (solid, remove dead copper, pour order 1003): 1185,8265 1190,8270 3345,8270 3345,7080 1185,7080
GND201A on Top Layer "I/O board gnd" (solid, remove dead copper, pour order 1002): 2140,6530 2140,5125 4210,5125 4210,6530
VCC201A on Top Layer "I/O board vcc" (solid, remove dead copper, pour order 1001): 1185,5125 2140,5125 2140,6530 1185,6530
NetC201_2 on Top Layer "IO board LED VCC" (solid, remove dead copper, pour order 1000): 3090,6295 3125,6330 3400,6330 3485,6330 3745,6070 3780,6035 3780,5655 3780,5615 3535,5370 3490,5325 3105,5325 3070,5325 2900,5495 2795,5600 2795,5810 2795,5995 2805,6005 2940,6140 2940,6210
VCC102A on Top Layer "Top Layer-vcc_led" (solid, remove dead copper, pour order 1000): 1150,4850 1150,4655 1155,4650 2880,4650 2880,4850
VCC102A on Top Layer "Top Layer-vcc_led" (solid, remove dead copper, pour order 1001): 1635,4130 1635,4826.22 1151.25,4826.22 1150,4824.98 1150,4652.5
VCC102A on Top Layer "Top Layer-vcc_led" (solid, remove dead copper, pour order 1002): 1625,3950 2410,3950 2410,4825 1630,4825 1620,4814.65
VCC102A on Top Layer "Top Layer-vcc_led" (solid, remove dead copper, pour order 1003): 1625,3950 2410,3950 2410,4765 2375,4800 2335,4760 1620,4760
VCC102A on Top Layer "Top Layer-vcc_led" (solid, remove dead copper, pour order 1004): 2880,4650 2280,4650 2275,4645 2305,4615 2305,4030
VCC101 on Bottom Layer "PSU board gnd" (solid, remove dead copper, pour order 1001): 4435,8200 6610,8200 6610,7005 4435,7005
GND101B on Bottom Layer "PSU board gnd" (solid, remove dead copper, pour order 1005): 1180,8265 3340,8265 3345,8270 3345,7080 1185,7080 1180,7085
GND201A on Bottom Layer "I/O board gnd" (solid, remove dead copper, pour order 1004): 4210,5125 4210,6530 1190,6530 1190,5130 1185,5125
GND101A on Bottom Layer "bottom layer gnd - led " (solid, remove dead copper, pour order 1005): 1620,4140 1630,4150 1630,4745 1245,4745 1150,4650
GND101A on Bottom Layer "bottom layer gnd - led " (solid, remove dead copper, pour order 1006): 1150.04,4650.04 1150,4650.08 1150,4850 2880,4850 2880,4650
GND101A on Bottom Layer "bottom layer gnd - led " (solid, remove dead copper, pour order 1007): 2410,3950 1625,3950 1620,3955 1620,4705 2410,4705
GND101A on Bottom Layer "bottom layer gnd - led " (solid, remove dead copper, pour order 1008): 2880,4650 2200,4650 2200,4110 2290,4020 2290,4015

## Silkscreen, mask and mechanical layers (free items; w line width, h text height)
Top Overlay:
  circle w10: c2396.34,2390 r944.88
  circle w10: c2396.34,2390 r708.66
  circle w10: c4401.34,2395 r708.66
  circle w10: c4401.34,2395 r944.88
Mechanical 15:
  lines w3.94: 1622.44,3946.34 1622.44,4143.19 1150,4655 ; 2409.84,3946.34 2409.84,4143.19 2882.28,4655 ; 1150,4655 1150,4851.85 2882.28,4851.85 2882.28,3946.34 1150,3946.34 1150,4655
  lines w10: 1181.1,6535 1181.1,5118.11 4213.11,5118.11 4215,5120 4215,6535 ; 1181.1,6535.43 4215,6535.43 ; 1968.5,6535 1968.5,7007.87 ; 1970,7007.87 3820,7007.87 ; 2362.2,5115 2362.2,6535 ; 3050,6535 3051.18,7002.87 ; 3346.1,7086.61 3346.1,8270 1181.1,8270 1181.1,7086.61 3346.46,7086.61 ; 3523.62,6530 3523.62,7002.87 ; 3821.3,6535 3821.3,7007.87 ; 6606.1,7011.61 6606.1,8195 4441.1,8195 4441.1,7011.61 6606.46,7011.61

## Text inside footprints (layer, text, board x,y; h text height)
OptRx101: Bottom Overlay "+" at 4676.85,7874.8 h31.5; Bottom Overlay "-" at 4838.27,7874.8 h31.5; Bottom Overlay "O" at 4999.69,7870.87 h31.5
OptTx101: Bottom Overlay "+" at 4834.33,8010.87 h31.5; Bottom Overlay "-" at 4672.91,8002.99 h31.5; Bottom Overlay "In" at 4999.69,8010.87 h31.5